# EAGLE board combined_80_50_xqfp (EAGLE 6.4)
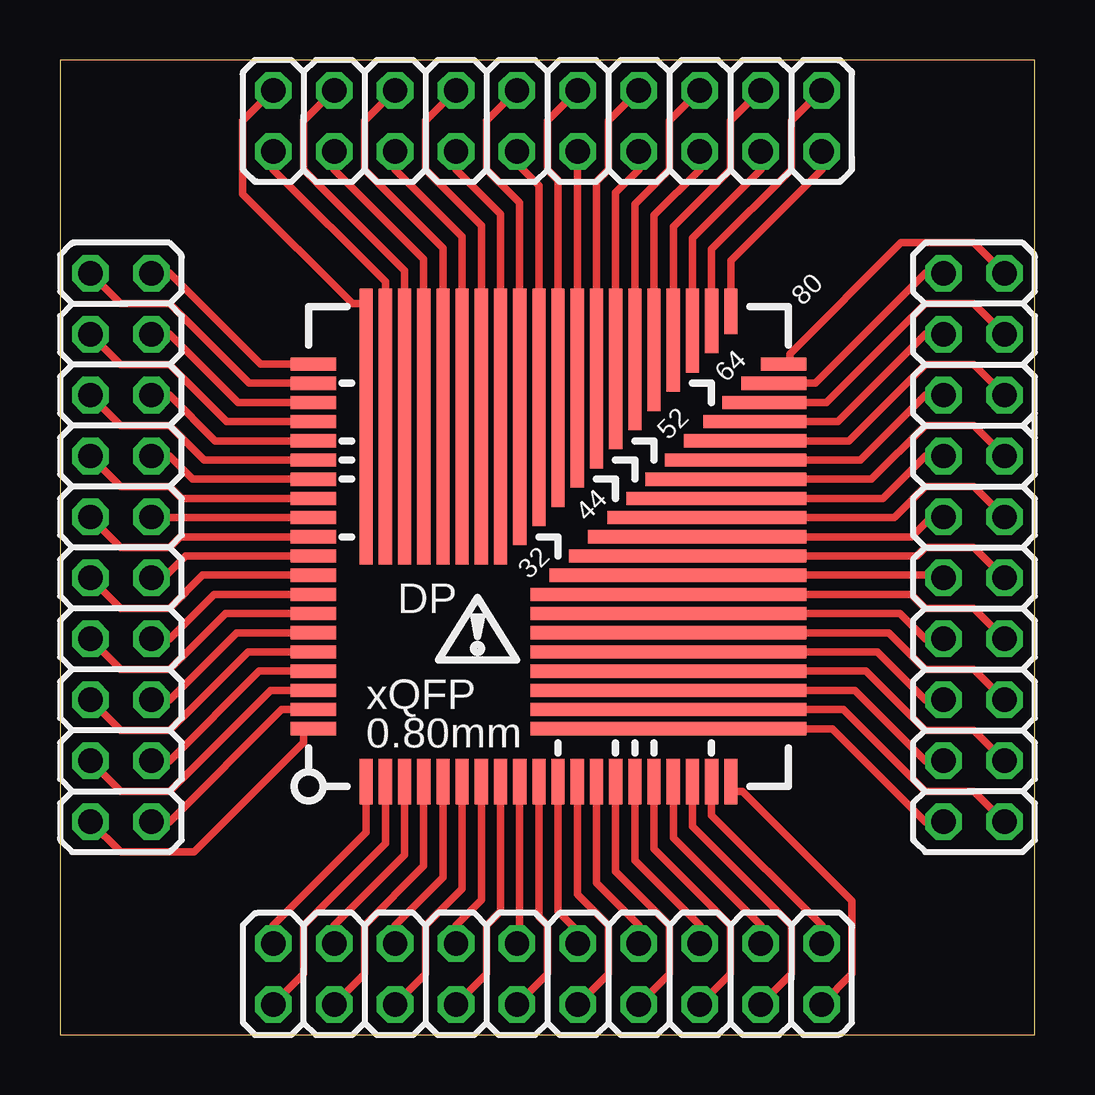
[diagram p0: board, top side]
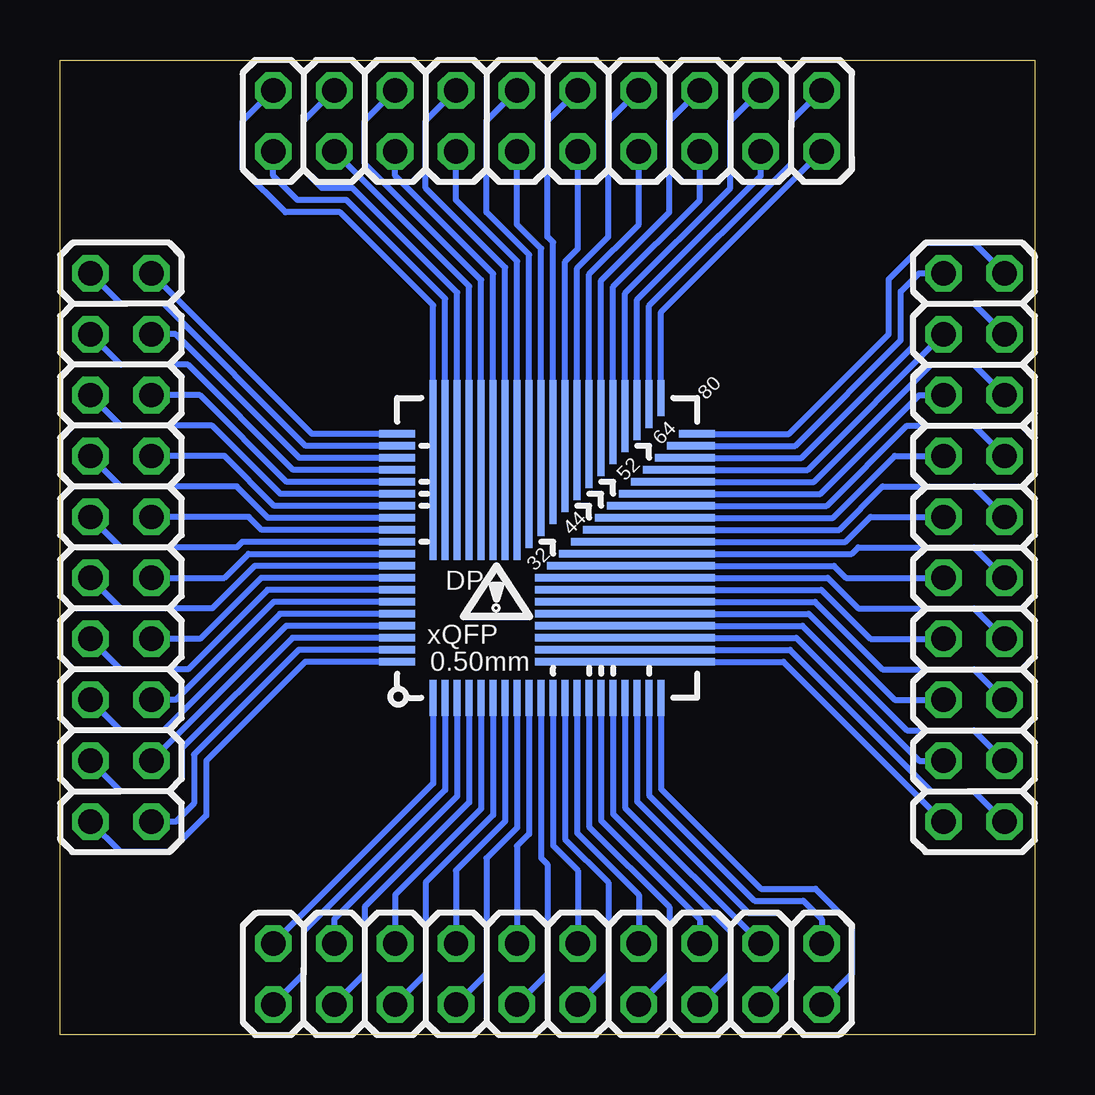
[diagram p1: board, bottom side, seen from below]

Size 40.64 x 40.64 mm. Coordinates in mm from the lower left corner, seen from the top.
Outline: 0,0 40.64,0 40.64,40.64 0,40.64 0,0
Copper layers (1*2*15*16): Top 0.035mm / dielectric 0.2mm / layer 2 0.0175mm / dielectric 1.1mm / layer 15 0.0175mm / dielectric 0.2mm / Bottom 0.035mm
Design rules "SeeedStudio_DRU_no_angle_20130527": minimum track width 6mil, minimum drill 12mil, track to track 6mil, track to pad 6mil, pad to pad 6mil, via to via 6mil, smd to smd 0mil, copper to edge 10mil, drill to drill 10mil, minimum pad ring 6mil, minimum via ring 6mil, stop-mask expansion 2mil, vias tented up to drill 25mil, thermal gap 10mil

## Footprints (pad centres in the part's own frame; a part is rotated, then mirrored left to right if it is on the bottom)
2X10 = drill 1.016 octagon: 1 -11.43,-1.27; 2 -11.43,1.27; 3 -8.89,-1.27; 4 -8.89,1.27; 5 -6.35,-1.27; 6 -6.35,1.27; 7 -3.81,-1.27; 8 -3.81,1.27; 9 -1.27,-1.27; 10 -1.27,1.27; 11 1.27,-1.27; 12 1.27,1.27; 13 3.81,-1.27; 14 3.81,1.27; 15 6.35,-1.27; 16 6.35,1.27; 17 8.89,-1.27; 18 8.89,1.27; 19 11.43,-1.27; 20 11.43,1.27
BB_QFP_050 = smd 0.3 x 1.5: 1 -3.75,-5.25; 2 -3.25,-5.25; 3 -2.75,-5.25; 4 -2.25,-5.25; 5 -1.75,-5.25; 6 -1.25,-5.25; 7 -0.75,-5.25; 8 -0.25,-5.25; 9 0.25,-5.25; 10 0.75,-5.25; 11 1.25,-5.25; 12 1.75,-5.25; 13 2.25,-5.25; 14 2.75,-5.25; 15 3.25,-5.25; 16 3.75,-5.25; 17 4.25,-5.25; 18 4.75,-5.25; 19 5.25,-5.25; 20 5.75,-5.25; 41 5.75,7.25 | smd 7.5 x 0.3: 21 4.25,-3.75; 22 4.25,-3.25; 23 4.25,-2.75; 24 4.25,-2.25; 25 4.25,-1.75; 26 4.25,-1.25; 27 4.25,-0.75; 28 4.25,-0.25 | smd 7 x 0.3: 29 4.5,0.25 | smd 6.5 x 0.3: 30 4.75,0.75 | smd 6 x 0.3: 31 5,1.25 | smd 5.5 x 0.3: 32 5.25,1.75 | smd 5 x 0.3: 33 5.5,2.25 | smd 4.5 x 0.3: 34 5.75,2.75 | smd 4 x 0.3: 35 6,3.25 | smd 3.5 x 0.3: 36 6.25,3.75 | smd 3 x 0.3: 37 6.5,4.25 | smd 2.5 x 0.3: 38 6.75,4.75 | smd 2 x 0.3: 39 7,5.25 | smd 1.5 x 0.3: 40 7.25,5.75; 61 -5.25,5.75; 62 -5.25,5.25; 63 -5.25,4.75; 64 -5.25,4.25; 65 -5.25,3.75; 66 -5.25,3.25; 67 -5.25,2.75; 68 -5.25,2.25; 69 -5.25,1.75; 70 -5.25,1.25; 71 -5.25,0.75; 72 -5.25,0.25; 73 -5.25,-0.25; 74 -5.25,-0.75; 75 -5.25,-1.25; 76 -5.25,-1.75; 77 -5.25,-2.25; 78 -5.25,-2.75; 79 -5.25,-3.25; 80 -5.25,-3.75 | smd 0.3 x 2: 42 5.25,7 | smd 0.3 x 2.5: 43 4.75,6.75 | smd 0.3 x 3: 44 4.25,6.5 | smd 0.3 x 3.5: 45 3.75,6.25 | smd 0.3 x 4: 46 3.25,6 | smd 0.3 x 4.5: 47 2.75,5.75 | smd 0.3 x 5: 48 2.25,5.5 | smd 0.3 x 5.5: 49 1.75,5.25 | smd 0.3 x 6: 50 1.25,5 | smd 0.3 x 6.5: 51 0.75,4.75 | smd 0.3 x 7: 52 0.25,4.5 | smd 0.3 x 7.5: 53 -0.25,4.25; 54 -0.75,4.25; 55 -1.25,4.25; 56 -1.75,4.25; 57 -2.25,4.25; 58 -2.75,4.25; 59 -3.25,4.25; 60 -3.75,4.25
BB_QFP_080 = smd 0.55 x 1.9: 1 -4,-6.2; 2 -3.2,-6.2; 3 -2.4,-6.2; 4 -1.6,-6.2; 5 -0.8,-6.2; 6 0,-6.2; 7 0.8,-6.2; 8 1.6,-6.2; 9 2.4,-6.2; 10 3.2,-6.2; 11 4,-6.2; 12 4.8,-6.2; 13 5.6,-6.2; 14 6.4,-6.2; 15 7.2,-6.2; 16 8,-6.2; 17 8.8,-6.2; 18 9.6,-6.2; 19 10.4,-6.2; 20 11.2,-6.2; 41 11.2,13.4 | smd 11.5 x 0.55: 21 8.6,-4; 22 8.6,-3.2; 23 8.6,-2.4; 24 8.6,-1.6; 25 8.6,-0.8; 26 8.6,0; 27 8.6,0.8; 28 8.6,1.6 | smd 10.7 x 0.55: 29 9,2.4 | smd 9.9 x 0.55: 30 9.4,3.2 | smd 9.1 x 0.55: 31 9.8,4 | smd 8.3 x 0.55: 32 10.2,4.8 | smd 7.5 x 0.55: 33 10.6,5.6 | smd 6.7 x 0.55: 34 11,6.4 | smd 5.9 x 0.55: 35 11.4,7.2 | smd 5.1 x 0.55: 36 11.8,8 | smd 4.3 x 0.55: 37 12.2,8.8 | smd 3.5 x 0.55: 38 12.6,9.6 | smd 2.7 x 0.55: 39 13,10.4 | smd 1.9 x 0.55: 40 13.4,11.2; 61 -6.2,11.2; 62 -6.2,10.4; 63 -6.2,9.6; 64 -6.2,8.8; 65 -6.2,8; 66 -6.2,7.2; 67 -6.2,6.4; 68 -6.2,5.6; 69 -6.2,4.8; 70 -6.2,4; 71 -6.2,3.2; 72 -6.2,2.4; 73 -6.2,1.6; 74 -6.2,0.8; 75 -6.2,0; 76 -6.2,-0.8; 77 -6.2,-1.6; 78 -6.2,-2.4; 79 -6.2,-3.2; 80 -6.2,-4 | smd 0.55 x 2.7: 42 10.4,13 | smd 0.55 x 3.5: 43 9.6,12.6 | smd 0.55 x 4.3: 44 8.8,12.2 | smd 0.55 x 5.1: 45 8,11.8 | smd 0.55 x 5.9: 46 7.2,11.4 | smd 0.55 x 6.7: 47 6.4,11 | smd 0.55 x 7.5: 48 5.6,10.6 | smd 0.55 x 8.3: 49 4.8,10.2 | smd 0.55 x 9.1: 50 4,9.8 | smd 0.55 x 9.9: 51 3.2,9.4 | smd 0.55 x 10.7: 52 2.4,9 | smd 0.55 x 11.5: 53 1.6,8.6; 54 0.8,8.6; 55 0,8.6; 56 -0.8,8.6; 57 -1.6,8.6; 58 -2.4,8.6; 59 -3.2,8.6; 60 -4,8.6

## Placement (x,y rotation side)
JP13  [2X10]  20.32,2.54 180 bottom
JP14  [2X10]  38.1,20.32 90 bottom
JP15  [2X10]  20.32,38.1 0 bottom
JP16  [2X10]  2.54,20.32 270 bottom
U$1  BB_XQFP_050  [BB_QFP_050]  21.34,19.3 0 bottom
U$2  BB_XQFP_080  [BB_QFP_080]  16.76,16.76 0 top

## Library data of the parts
JP13-JP16 = pinhead
U$1 U$2 = DP_protoboard

## Nets
N$1: U$1.1
N$2: U$1.2
N$3: U$1.3
N$4: U$1.4
N$5: U$1.5
N$6: U$1.6
N$7: U$1.7
N$8: U$1.8
N$9: U$1.9
N$10: U$1.10
N$11: U$1.11
N$12: U$1.12
N$13: U$1.13
N$14: U$1.14
N$15: U$1.15
N$16: U$1.16
N$17: U$1.17
N$18: U$1.18
N$19: U$1.19
N$20: U$1.20
N$21: U$1.21
N$22: U$1.22
N$23: U$1.23
N$24: U$1.24
N$25: U$1.25
N$26: U$1.26
N$27: U$1.27
N$28: U$1.28
N$29: U$1.29
N$30: U$1.30
N$31: U$1.31
N$32: U$1.32
N$33: U$1.33
N$34: U$1.34
N$35: U$1.35
N$36: U$1.36
N$37: U$1.37
N$38: U$1.38
N$39: U$1.39
N$40: U$1.40
N$41: U$1.41
N$42: U$1.42
N$43: U$1.43
N$44: U$1.44
N$45: U$1.45
N$46: U$1.46
N$47: U$1.47
N$48: U$1.48
N$49: U$1.49
N$50: U$1.50
N$51: U$1.51
N$52: U$1.52
N$53: U$1.53
N$54: U$1.54
N$55: U$1.55
N$56: U$1.56
N$57: U$1.57
N$58: U$1.58
N$59: U$1.59
N$60: U$1.60
N$61: U$1.61
N$62: U$1.62
N$63: U$1.63
N$64: U$1.64
N$65: U$1.65
N$66: U$1.66
N$67: U$1.67
N$68: U$1.68
N$69: U$1.69
N$70: U$1.70
N$71: U$1.71
N$72: U$1.72
N$73: U$1.73
N$74: U$1.74
N$75: U$1.75
N$76: U$1.76
N$77: U$1.77
N$78: U$1.78
N$79: U$1.79
N$80: U$1.80
N$89: JP13.1 U$2.1
N$90: JP13.2 U$2.2
N$91: JP13.3 U$2.3
N$92: JP13.4 U$2.4
N$93: JP13.5 U$2.5
N$94: JP13.6 U$2.6
N$95: JP13.7 U$2.7
N$96: JP13.8 U$2.8
N$97: JP13.9 U$2.9
N$98: JP13.10 U$2.10
N$99: JP13.11 U$2.11
N$100: JP13.12 U$2.12
N$101: JP13.13 U$2.13
N$102: JP13.14 U$2.14
N$103: JP13.15 U$2.15
N$104: JP13.16 U$2.16
N$105: JP13.17 U$2.17
N$106: JP13.18 U$2.18
N$107: JP13.19 U$2.19
N$108: JP13.20 U$2.20
N$109: JP14.1 U$2.21
N$110: JP14.2 U$2.22
N$111: JP14.3 U$2.23
N$112: JP14.4 U$2.24
N$113: JP14.5 U$2.25
N$114: JP14.6 U$2.26
N$115: JP14.7 U$2.27
N$116: JP14.8 U$2.28
N$117: JP14.9 U$2.29
N$118: JP14.10 U$2.30
N$119: JP14.11 U$2.31
N$120: JP14.12 U$2.32
N$121: JP14.13 U$2.33
N$122: JP14.14 U$2.34
N$123: JP14.15 U$2.35
N$124: JP14.16 U$2.36
N$125: JP14.17 U$2.37
N$126: JP14.18 U$2.38
N$127: JP14.19 U$2.39
N$128: JP14.20 U$2.40
N$129: JP15.1 U$2.41
N$130: JP15.2 U$2.42
N$131: JP15.3 U$2.43
N$132: JP15.4 U$2.44
N$133: JP15.5 U$2.45
N$134: JP15.6 U$2.46
N$135: JP15.7 U$2.47
N$136: JP15.8 U$2.48
N$137: JP15.9 U$2.49
N$138: JP15.10 U$2.50
N$139: JP15.11 U$2.51
N$140: JP15.12 U$2.52
N$141: JP15.13 U$2.53
N$142: JP15.14 U$2.54
N$143: JP15.15 U$2.55
N$144: JP15.16 U$2.56
N$145: JP15.17 U$2.57
N$146: JP15.18 U$2.58
N$147: JP15.19 U$2.59
N$148: JP15.20 U$2.60
N$149: JP16.1 U$2.61
N$150: JP16.2 U$2.62
N$151: JP16.3 U$2.63
N$152: JP16.4 U$2.64
N$153: JP16.5 U$2.65
N$154: JP16.6 U$2.66
N$155: JP16.7 U$2.67
N$156: JP16.8 U$2.68
N$157: JP16.9 U$2.69
N$158: JP16.10 U$2.70
N$159: JP16.11 U$2.71
N$160: JP16.12 U$2.72
N$161: JP16.13 U$2.73
N$162: JP16.14 U$2.74
N$163: JP16.15 U$2.75
N$164: JP16.16 U$2.76
N$165: JP16.17 U$2.77
N$166: JP16.18 U$2.78
N$167: JP16.19 U$2.79
N$168: JP16.20 U$2.80

## Tracks (layer width: path | path; a pad name or v marks a point on that pad's centre or on a via)
N$1
  Bottom 0.254: U$1.1 25.09,10.47 31.75,3.81
N$2
  Bottom 0.254: U$1.2 24.59,10.21 30.48,4.32 30.48,2.54 31.75,1.27
N$3
  Bottom 0.254: U$1.3 24.09,9.95 29.21,4.83 29.21,3.81
N$4
  Bottom 0.254: U$1.4 23.59,9.69 27.94,5.33 27.94,2.54 29.21,1.27
N$5
  Bottom 0.254: U$1.5 23.09,9.43 26.67,5.84 26.67,3.81
N$6
  Bottom 0.254: U$1.6 22.59,9.16 25.4,6.35 25.4,2.54 26.67,1.27
N$7
  Bottom 0.254: U$1.7 22.09,8.9 24.13,6.86 24.13,3.81
N$8
  Bottom 0.254: U$1.8 21.59,8.64 22.86,7.37 22.86,2.54 24.13,1.27
N$9
  Bottom 0.254: U$1.9 21.09,8.38 21.59,7.87 21.59,3.81
N$10
  Bottom 0.254: U$1.10 20.59,7.38 20.32,7.11 20.32,2.54 21.59,1.27
N$11
  Bottom 0.254: U$1.11 20.09,7.89 19.05,6.86 19.05,3.81
N$12
  Bottom 0.254: U$1.12 19.59,8.16 17.78,6.35 17.78,2.54 19.05,1.27
N$13
  Bottom 0.254: U$1.13 19.09,8.42 16.51,5.84 16.51,3.81
N$14
  Bottom 0.254: U$1.14 18.59,8.68 15.24,5.33 15.24,2.54 16.51,1.27
N$15
  Bottom 0.254: U$1.15 18.09,8.94 13.97,4.83 13.97,3.81
N$16
  Bottom 0.254: U$1.16 17.59,9.2 12.7,4.32 12.7,2.54 13.97,1.27
N$17
  Bottom 0.254: U$1.17 17.09,9.47 11.43,3.81
N$18
  Bottom 0.254: U$1.18 16.59,9.73 11.94,5.08 10.67,5.08 10.16,4.57 10.16,2.54 11.43,1.27
N$19
  Bottom 0.254: U$1.19 16.09,9.99 11.68,5.59 9.65,5.59 8.89,4.83 8.89,3.81
N$20
  Bottom 0.254: U$1.20 15.59,10.25 11.43,6.1 9.14,6.1 7.62,4.57 7.62,2.54 8.89,1.27
N$21
  Bottom 0.254: U$1.21 10.47,15.55 3.81,8.89
N$22
  Bottom 0.254: U$1.22 10.21,16.05 4.32,10.16 2.54,10.16 1.27,8.89
N$23
  Bottom 0.254: U$1.23 9.95,16.55 4.83,11.43 3.81,11.43
N$24
  Bottom 0.254: U$1.24 9.69,17.05 5.33,12.7 2.54,12.7 1.27,11.43
N$25
  Bottom 0.254: U$1.25 9.43,17.55 5.84,13.97 3.81,13.97
N$26
  Bottom 0.254: U$1.26 9.16,18.05 6.35,15.24 2.54,15.24 1.27,13.97
N$27
  Bottom 0.254: U$1.27 8.9,18.55 6.86,16.51 3.81,16.51
N$28
  Bottom 0.254: U$1.28 8.64,19.05 7.37,17.78 2.54,17.78 1.27,16.51
N$29
  Bottom 0.254: U$1.29 8.38,19.55 7.87,19.05 3.81,19.05
N$30
  Bottom 0.254: U$1.30 7.63,20.05 7.37,20.32 2.54,20.32 1.27,19.05
N$31
  Bottom 0.254: U$1.31 7.89,20.55 6.86,21.59 3.81,21.59
N$32
  Bottom 0.254: U$1.32 8.16,21.05 6.35,22.86 2.54,22.86 1.27,21.59
N$33
  Bottom 0.254: U$1.33 8.42,21.55 5.84,24.13 3.81,24.13
N$34
  Bottom 0.254: U$1.34 8.68,22.05 5.33,25.4 2.54,25.4 1.27,24.13
N$35
  Bottom 0.254: U$1.35 8.94,22.55 4.83,26.67 3.81,26.67
N$36
  Bottom 0.254: U$1.36 9.2,23.05 4.32,27.94 2.54,27.94 1.27,26.67
N$37
  Bottom 0.254: U$1.37 9.47,23.55 3.81,29.21
N$38
  Bottom 0.254: U$1.38 9.73,24.05 5.08,28.7 5.08,29.97 4.57,30.48 2.54,30.48 1.27,29.21
N$39
  Bottom 0.254: U$1.39 9.99,24.55 5.59,28.96 5.59,30.99 4.83,31.75 3.81,31.75
N$40
  Bottom 0.254: U$1.40 10.25,25.05 6.1,29.21 6.1,31.5 4.57,33.02 2.54,33.02 1.27,31.75
N$41
  Bottom 0.254: U$1.41 15.59,30.13 8.89,36.83
N$42
  Bottom 0.254: U$1.42 16.09,30.4 10.16,36.32 10.16,38.1 8.89,39.37
N$43
  Bottom 0.254: U$1.43 16.59,30.66 11.43,35.81 11.43,36.83
N$44
  Bottom 0.254: U$1.44 17.09,30.92 12.7,35.31 12.7,38.1 11.43,39.37
N$45
  Bottom 0.254: U$1.45 17.59,31.18 13.97,34.8 13.97,36.83
N$46
  Bottom 0.254: U$1.46 18.09,31.44 15.24,34.29 15.24,38.1 13.97,39.37
N$47
  Bottom 0.254: U$1.47 18.59,31.71 16.51,33.78 16.51,36.83
N$48
  Bottom 0.254: U$1.48 19.09,31.97 17.78,33.27 17.78,38.1 16.51,39.37
N$49
  Bottom 0.254: U$1.49 19.59,32.23 19.05,32.77 19.05,36.83
N$50
  Bottom 0.254: U$1.50 20.09,33.04 20.32,33.27 20.32,38.1 19.05,39.37
N$51
  Bottom 0.254: U$1.51 20.59,32.78 21.59,33.78 21.59,36.83
N$52
  Bottom 0.254: U$1.52 21.09,32.52 22.86,34.29 22.86,38.1 21.59,39.37
N$53
  Bottom 0.254: U$1.53 21.59,32.25 24.13,34.8 24.13,36.83
N$54
  Bottom 0.254: U$1.54 22.09,31.99 25.4,35.31 25.4,38.1 24.13,39.37
N$55
  Bottom 0.254: U$1.55 22.59,31.73 26.67,35.81 26.67,36.83
N$56
  Bottom 0.254: U$1.56 23.09,31.47 27.94,36.32 27.94,38.1 26.67,39.37
N$57
  Bottom 0.254: U$1.57 23.59,31.21 29.21,36.83
N$58
  Bottom 0.254: U$1.58 24.09,30.94 28.45,35.31 29.72,35.31 30.48,36.07 30.48,38.1 29.21,39.37
N$59
  Bottom 0.254: U$1.59 24.59,30.68 28.7,34.8 30.73,34.8 31.75,35.81 31.75,36.83
N$60
  Bottom 0.254: U$1.60 25.09,30.42 28.96,34.29 31.24,34.29 33.02,36.07 33.02,38.1 31.75,39.37
N$61
  Bottom 0.254: U$1.61 30.13,25.05 36.83,31.75
N$62
  Bottom 0.254: U$1.62 30.4,24.55 36.32,30.48 38.1,30.48 39.37,31.75
N$63
  Bottom 0.254: U$1.63 30.66,24.05 35.81,29.21 36.83,29.21
N$64
  Bottom 0.254: U$1.64 30.92,23.55 35.31,27.94 38.1,27.94 39.37,29.21
N$65
  Bottom 0.254: U$1.65 31.18,23.05 34.8,26.67 36.83,26.67
N$66
  Bottom 0.254: U$1.66 31.44,22.55 34.29,25.4 38.1,25.4 39.37,26.67
N$67
  Bottom 0.254: U$1.67 31.71,22.05 33.78,24.13 36.83,24.13
N$68
  Bottom 0.254: U$1.68 31.97,21.55 33.27,22.86 38.1,22.86 39.37,24.13
N$69
  Bottom 0.254: U$1.69 32.23,21.05 32.77,21.59 36.83,21.59
N$70
  Bottom 0.254: U$1.70 33.04,20.55 33.27,20.32 38.1,20.32 39.37,21.59
N$71
  Bottom 0.254: U$1.71 32.78,20.05 33.78,19.05 36.83,19.05
N$72
  Bottom 0.254: U$1.72 32.52,19.55 34.29,17.78 38.1,17.78 39.37,19.05
N$73
  Bottom 0.254: U$1.73 32.25,19.05 34.8,16.51 36.83,16.51
N$74
  Bottom 0.254: U$1.74 31.99,18.55 35.31,15.24 38.1,15.24 39.37,16.51
N$75
  Bottom 0.254: U$1.75 31.73,18.05 35.81,13.97 36.83,13.97
N$76
  Bottom 0.254: U$1.76 31.47,17.55 36.32,12.7 38.1,12.7 39.37,13.97
N$77
  Bottom 0.254: U$1.77 31.21,17.05 36.83,11.43
N$78
  Bottom 0.254: U$1.78 30.94,16.55 35.56,11.94 35.56,10.67 36.07,10.16 38.1,10.16 39.37,11.43
N$79
  Bottom 0.254: U$1.79 30.68,16.05 35.05,11.68 35.05,9.65 35.81,8.89 36.83,8.89
N$80
  Bottom 0.254: U$1.80 30.42,15.55 34.54,11.43 34.54,9.14 36.07,7.62 38.1,7.62 39.37,8.89
N$89
  Top 0.305: U$2.1 12.76,8.45 8.89,4.57 JP13.1
N$90
  Top 0.305: U$2.2 13.56,7.98 10.16,4.57 10.16,2.54 JP13.2
N$91
  Top 0.305: U$2.3 14.36,7.51 11.43,4.57 JP13.3
N$92
  Top 0.305: U$2.4 15.16,7.04 12.7,4.57 12.7,2.54 JP13.4
N$93
  Top 0.305: U$2.5 15.96,6.57 13.97,4.57 JP13.5
N$94
  Top 0.305: U$2.6 16.76,6.1 15.24,4.57 15.24,2.54 JP13.6
N$95
  Top 0.305: U$2.7 17.56,5.63 16.51,4.57 JP13.7
N$96
  Top 0.305: U$2.8 18.36,5.16 17.78,4.57 17.78,2.54 JP13.8
N$97
  Top 0.305: U$2.9 19.16,3.92 JP13.9
N$98
  Top 0.305: U$2.10 19.96,4.93 20.32,4.57 20.32,2.54 JP13.10
N$99
  Top 0.305: U$2.11 20.76,5.14 21.59,4.32 JP13.11
N$100
  Top 0.305: U$2.12 21.56,5.87 22.86,4.57 22.86,2.54 JP13.12
N$101
  Top 0.305: U$2.13 22.36,6.34 24.13,4.57 JP13.13
N$102
  Top 0.305: U$2.14 23.16,6.81 25.4,4.57 25.4,2.54 JP13.14
N$103
  Top 0.305: U$2.15 23.96,7.28 26.67,4.57 JP13.15
N$104
  Top 0.305: U$2.16 24.76,7.75 27.94,4.57 27.94,2.54 JP13.16
N$105
  Top 0.305: U$2.17 25.56,8.22 29.21,4.57 JP13.17
N$106
  Top 0.305: U$2.18 26.36,8.69 30.48,4.57 30.48,2.54 JP13.18
N$107
  Top 0.305: U$2.19 27.16,9.16 31.75,4.57 JP13.19
N$108
  Top 0.305: JP13.20 33.02,2.54 33.02,5.59 28.45,10.16 27.96,10.16 U$2.20
N$109
  Top 0.305: U$2.21 32.19,12.76 36.07,8.89 JP14.1
N$110
  Top 0.305: U$2.22 32.66,13.56 36.07,10.16 38.1,10.16 JP14.2
N$111
  Top 0.305: U$2.23 33.13,14.36 36.07,11.43 JP14.3
N$112
  Top 0.305: U$2.24 33.6,15.16 36.07,12.7 38.1,12.7 JP14.4
N$113
  Top 0.305: U$2.25 34.07,15.96 36.07,13.97 JP14.5
N$114
  Top 0.305: U$2.26 34.54,16.76 36.07,15.24 38.1,15.24 JP14.6
N$115
  Top 0.305: U$2.27 35.01,17.56 36.07,16.51 JP14.7
N$116
  Top 0.305: U$2.28 35.48,18.36 36.07,17.78 38.1,17.78 JP14.8
N$117
  Top 0.305: U$2.29 36.72,19.16 JP14.9
N$118
  Top 0.305: U$2.30 35.71,19.96 36.07,20.32 38.1,20.32 JP14.10
N$119
  Top 0.305: U$2.31 35.5,20.76 36.32,21.59 JP14.11
N$120
  Top 0.305: U$2.32 34.77,21.56 36.07,22.86 38.1,22.86 JP14.12
N$121
  Top 0.305: U$2.33 34.3,22.36 36.07,24.13 JP14.13
N$122
  Top 0.305: U$2.34 33.83,23.16 36.07,25.4 38.1,25.4 JP14.14
N$123
  Top 0.305: U$2.35 33.36,23.96 36.07,26.67 JP14.15
N$124
  Top 0.305: U$2.36 32.89,24.76 36.07,27.94 38.1,27.94 JP14.16
N$125
  Top 0.305: U$2.37 32.42,25.56 36.07,29.21 JP14.17
N$126
  Top 0.305: U$2.38 31.95,26.36 36.07,30.48 38.1,30.48 JP14.18
N$127
  Top 0.305: U$2.39 31.48,27.16 36.07,31.75 JP14.19
N$128
  Top 0.305: JP14.20 38.1,33.02 35.05,33.02 30.42,28.39 30.42,27.96 U$2.40
N$129
  Top 0.305: U$2.41 27.96,32.28 31.75,36.07 JP15.1
N$130
  Top 0.305: U$2.42 27.16,32.75 30.48,36.07 30.48,38.1 JP15.2
N$131
  Top 0.305: U$2.43 26.36,33.22 29.21,36.07 JP15.3
N$132
  Top 0.305: U$2.44 25.56,33.69 27.94,36.07 27.94,38.1 JP15.4
N$133
  Top 0.305: U$2.45 24.76,34.16 26.67,36.07 JP15.5
N$134
  Top 0.305: U$2.46 23.96,34.63 25.4,36.07 25.4,38.1 JP15.6
N$135
  Top 0.305: U$2.47 23.16,35.1 24.13,36.07 JP15.7
N$136
  Top 0.305: U$2.48 22.36,35.57 22.86,36.07 22.86,38.1 JP15.8
N$137
  Top 0.305: U$2.49 21.56,36.8 JP15.9
N$138
  Top 0.305: U$2.50 20.76,35.62 20.32,36.07 20.32,38.1 JP15.10
N$139
  Top 0.305: U$2.51 19.96,35.41 19.05,36.32 JP15.11
N$140
  Top 0.305: U$2.52 19.16,34.68 17.78,36.07 17.78,38.1 JP15.12
N$141
  Top 0.305: U$2.53 18.36,34.21 16.51,36.07 JP15.13
N$142
  Top 0.305: U$2.54 17.56,33.74 15.24,36.07 15.24,38.1 JP15.14
N$143
  Top 0.305: U$2.55 16.76,33.27 13.97,36.07 JP15.15
N$144
  Top 0.305: U$2.56 15.96,32.8 12.7,36.07 12.7,38.1 JP15.16
N$145
  Top 0.305: U$2.57 15.16,32.33 11.43,36.07 JP15.17
N$146
  Top 0.305: U$2.58 14.36,31.86 10.16,36.07 10.16,38.1 JP15.18
N$147
  Top 0.305: U$2.59 13.56,31.39 8.89,36.07 JP15.19
N$148
  Top 0.305: U$2.60 12.76,30.16 | 12.76,30.16 12.7,30.23 | JP15.20 7.62,38.1 7.62,35.05 12.19,30.48 12.76,30.48 12.76,30.16
N$149
  Top 0.305: U$2.61 8.36,27.96 4.57,31.75 JP16.1
N$150
  Top 0.305: U$2.62 7.89,27.16 4.57,30.48 2.54,30.48 JP16.2
N$151
  Top 0.305: U$2.63 7.42,26.36 4.57,29.21 JP16.3
N$152
  Top 0.305: U$2.64 6.95,25.56 4.57,27.94 2.54,27.94 JP16.4
N$153
  Top 0.305: U$2.65 6.48,24.76 4.57,26.67 JP16.5
N$154
  Top 0.305: U$2.66 6.01,23.96 4.57,25.4 2.54,25.4 JP16.6
N$155
  Top 0.305: U$2.67 5.54,23.16 4.57,24.13 JP16.7
N$156
  Top 0.305: U$2.68 5.07,22.36 4.57,22.86 2.54,22.86 JP16.8
N$157
  Top 0.305: U$2.69 3.84,21.56 JP16.9
N$158
  Top 0.305: U$2.70 5.02,20.76 4.57,20.32 2.54,20.32 JP16.10
N$159
  Top 0.305: U$2.71 5.23,19.96 4.32,19.05 JP16.11
N$160
  Top 0.305: U$2.72 5.96,19.16 4.57,17.78 2.54,17.78 JP16.12
N$161
  Top 0.305: U$2.73 6.43,18.36 4.57,16.51 JP16.13
N$162
  Top 0.305: U$2.74 6.9,17.56 4.57,15.24 2.54,15.24 JP16.14
N$163
  Top 0.305: U$2.75 7.37,16.76 4.57,13.97 JP16.15
N$164
  Top 0.305: U$2.76 7.84,15.96 4.57,12.7 2.54,12.7 JP16.16
N$165
  Top 0.305: U$2.77 8.31,15.16 4.57,11.43 JP16.17
N$166
  Top 0.305: U$2.78 8.78,14.36 4.57,10.16 2.54,10.16 JP16.18
N$167
  Top 0.305: U$2.79 9.25,13.56 4.57,8.89 JP16.19
N$168
  Top 0.305: JP16.20 2.54,7.62 5.59,7.62 10.16,12.19 10.16,12.76 U$2.80